# EAGLE board power.rev.3.4 (EAGLE 7.5.0)
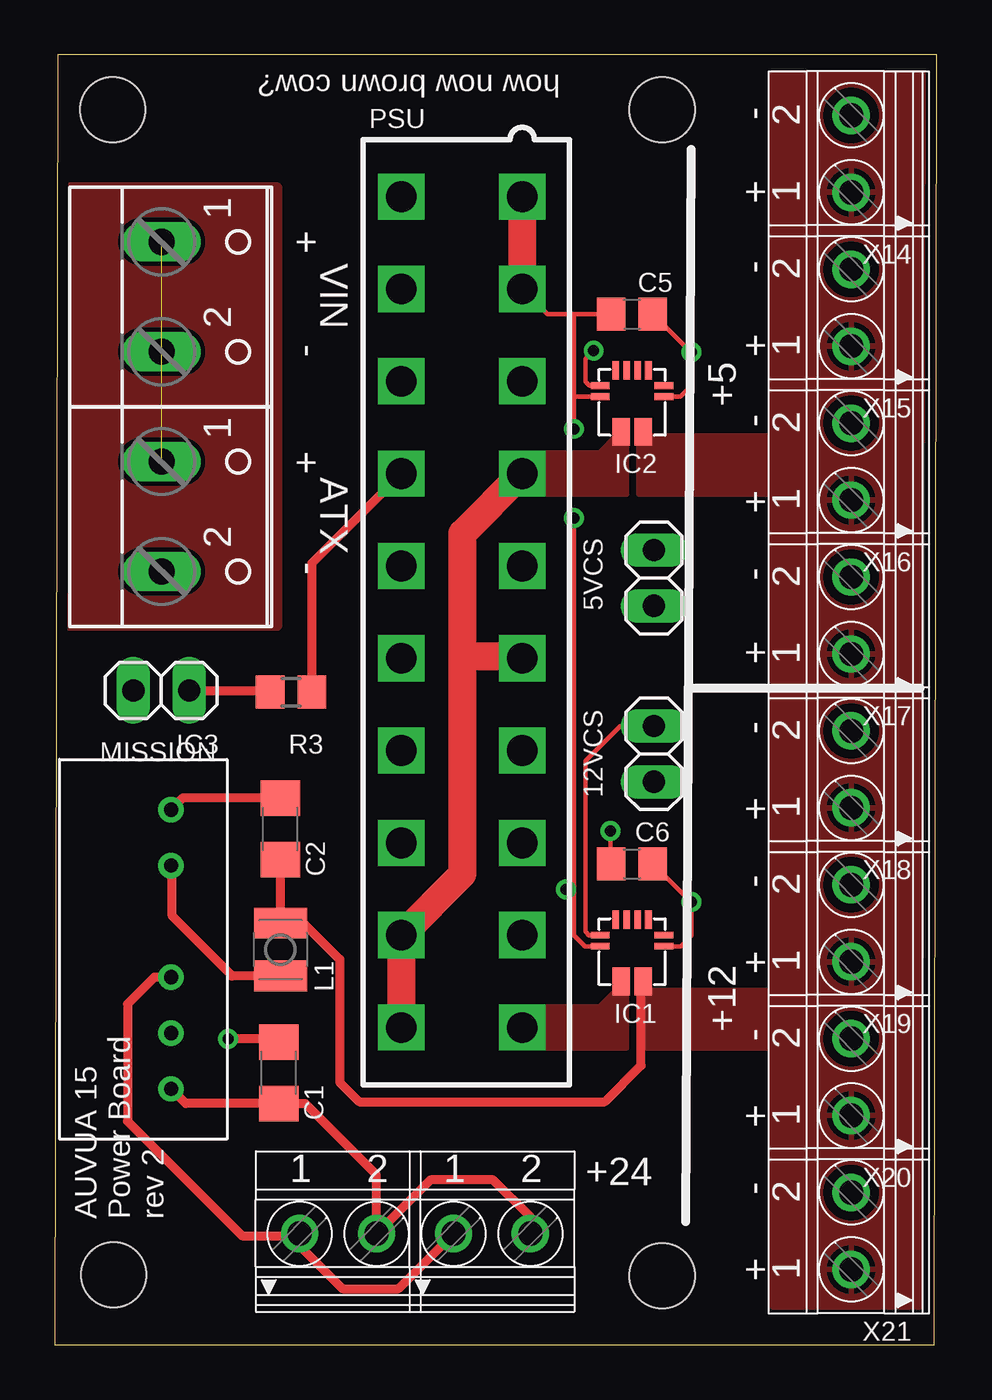
[diagram p0: board, top side]
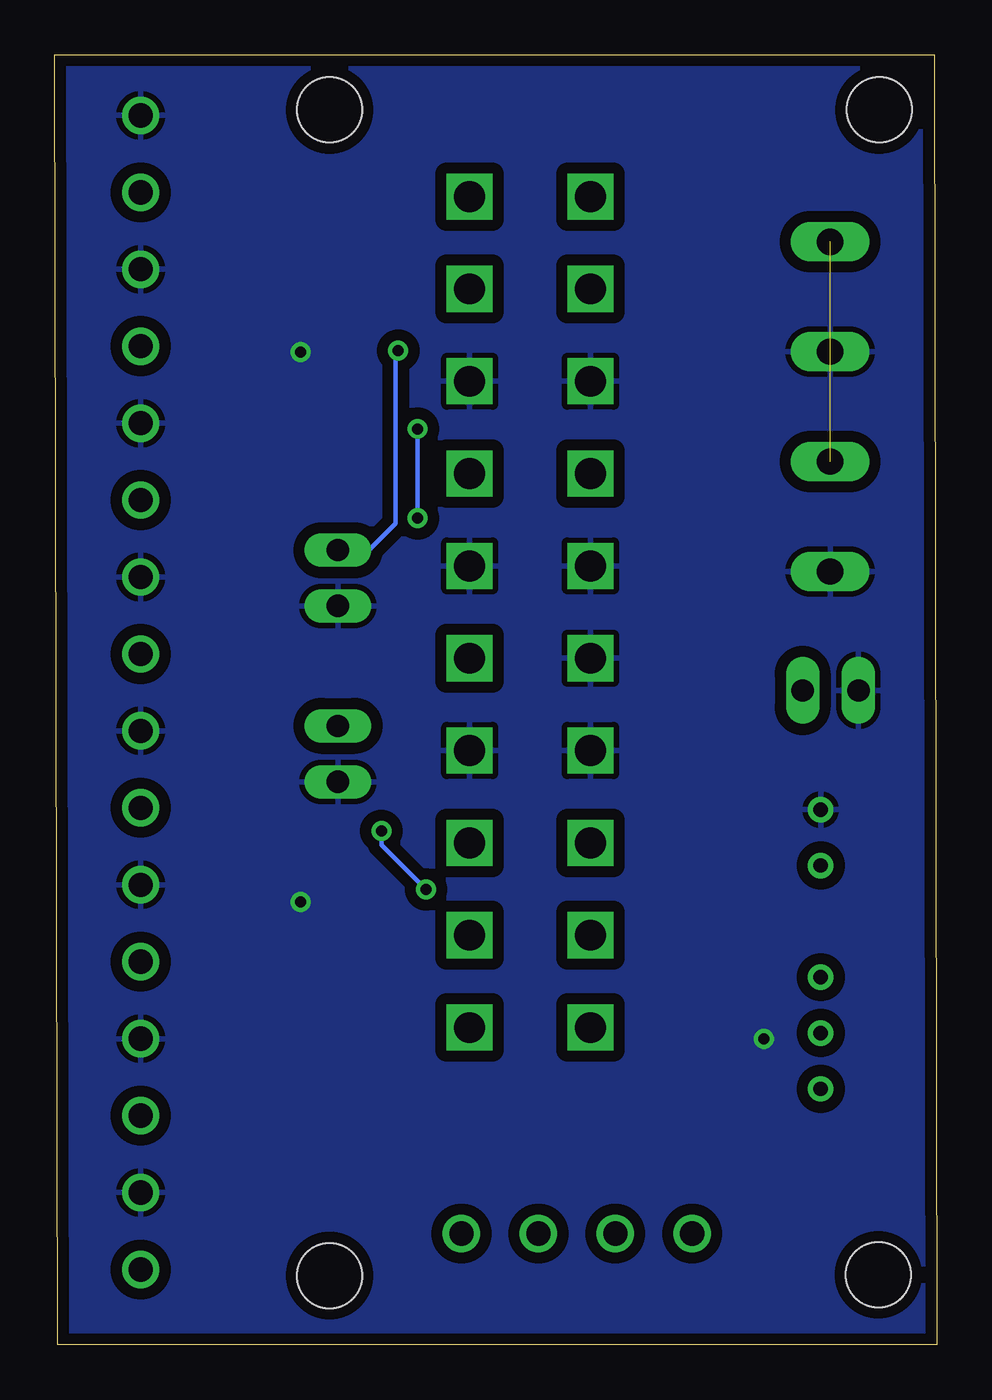
[diagram p1: board, bottom side, seen from below]

Size 40.13 x 58.66 mm. Coordinates in mm from the lower left corner, seen from the top.
Outline: 0,0 40,0 40.13,58.66 0.13,58.66 0,0
Copper layers (1*16): Top 0.035mm / dielectric 1.5mm / Bottom 0.035mm
Design rules "default *": minimum track width 8mil, minimum drill 20mil, track to track 8mil, track to pad 8mil, pad to pad 6mil, via to via 8mil, smd to smd 8mil, copper to edge 20mil, drill to drill 8mil, minimum pad ring 10mil, minimum via ring 8mil, stop-mask expansion 4mil, vias tented up to drill 0mil, thermal gap 10mil
Holes 2.95 mm at 2.67,3.18 2.63,56.16 27.63,56.16 27.63,3.13

## Footprints (pad centres in the part's own frame; a part is rotated, then mirrored left to right if it is on the bottom)
1X02 = drill 1.016 long: 1 -1.27,0; 2 1.27,0
W237-102 = drill 1.194 long: 1 -2.5,-1.27; 2 2.5,-1.27
C1206 = smd 1.6 x 1.8: 1 -1.4,0; 2 1.4,0
C0805 = smd 1.3 x 1.5: 1 -0.95,0; 2 0.95,0
12-WFQFN = smd 1.27 x 0.8: P$1 -1.35,0.5; P$2 -1.35,-0.5 | smd 0.3 x 0.85: P$3 0.25,-1.45; P$4 0.75,-1.45; P$9 0.75,1.45; P$10 0.25,1.45 | smd 0.85 x 0.3: P$5 1.45,-0.75; P$6 1.45,-0.25; P$7 1.45,0.25; P$8 1.45,0.75
6-SIP = drill 0.65: P$1 -6.35,0; P$2 -3.81,0; P$3 1.27,0; P$4 3.81,0; P$5 6.35,0
L2825P = smd 1.4 x 2.4: 1 -1.2,0; 2 1.2,0
5566-20 = drill 1.4 square: 1 18.9,-2.75; 2 14.7,-2.75; 3 10.5,-2.75; 4 6.3,-2.75; 5 2.1,-2.75; 6 -2.1,-2.75; 7 -6.3,-2.75; 8 -10.5,-2.75; 9 -14.7,-2.75; 10 -18.9,-2.75; 11 18.9,2.75; 12 14.7,2.75; 13 10.5,2.75; 14 6.3,2.75; 15 2.1,2.75; 16 -2.1,2.75; 17 -6.3,2.75; 18 -10.5,2.75; 19 -14.7,2.75; 20 -18.9,2.75
R0805 = smd 1.3 x 1.5: 1 -0.95,0; 2 0.95,0
1751248 = drill 1.1 pad 1.7: 1 -1.75,-0.1; 2 1.75,-0.1

## Placement (x,y rotation side)
5VCS  [1X02]  27.25,34.87 90 top
12VCS  [1X02]  27.25,26.87 90 top
ATX  [W237-102]  6.13,37.66 270 top
C1  220pF  [C1206]  10.18,12.36 90 top
C2  4.7uF  [C1206]  10.25,23.45 90 top
C5  0.1u  [C0805]  26.25,46.87 0 top
C6  0.1u  [C0805]  26.25,21.87 0 top
IC1  [12-WFQFN]  26.25,17.87 90 top
IC2  [12-WFQFN]  26.25,42.87 90 top
IC3  ITW1224SA  [6-SIP]  5.29,17.98 270 top
L1  18 uH  [L2825P]  10.26,17.97 270 top
MISSION  [1X02]  4.84,29.76 180 top
PSU  5566-20  [5566-20]  18.51,33.32 90 top
R3  10k  [R0805]  10.74,29.67 0 top
VIN  [W237-102]  6.13,47.66 270 top
X14  1751248  [1751248]  36.13,54.16 90 top
X15  1751248  [1751248]  36.13,47.16 90 top
X16  1751248  [1751248]  36.13,40.16 90 top
X17  1751248  [1751248]  36.13,33.16 90 top
X18  1751248  [1751248]  36.13,26.16 90 top
X19  1751248  [1751248]  36.13,19.16 90 top
X20  1751248  [1751248]  36.13,12.16 90 top
X21  1751248  [1751248]  36.13,5.16 90 top
X22  1751248  [1751248]  19.88,5.15 0 top
X23  1751248  [1751248]  12.88,5.15 0 top

## Library data of the parts
5VCS 12VCS MISSION = pinhead
ATX VIN = con-wago-500; MPN: 237-102; OC_FARNELL: unknown; OC_NEWARK: 70K9898
C1 C2 L1 R3 = resistor
C5 C6 = rcl
IC1-IC3 = zonapowerbrd
PSU = con-molex; OC_FARNELL: unknown; OC_NEWARK: unknown
X14-X23 = con-phoenix-350; OC_FARNELL: unknown; OC_NEWARK: unknown

## Nets
+3V3: C5.1 C6.1 IC1.P$10 IC2.P$10 PSU.1 PSU.2
+5V: IC2.P$1 PSU.4 PSU.6 PSU.19 PSU.20
+12V: IC1.P$1 PSU.10
GND: 5VCS.1 12VCS.1 ATX.2 C1.2 C2.2 C5.2 C6.2 IC1.P$3 IC2.P$3 IC3.P$1 MISSION.2 PSU.3 PSU.5 PSU.7 PSU.13 PSU.15 PSU.16 PSU.17 VIN.2 X14.2 X15.2 X16.2 X17.2 X18.2 X19.2 X20.2 X21.2
N$1: IC3.P$3 X22.1 X23.1
N$2: C1.1 IC3.P$5 X22.2 X23.2
N$3: IC3.P$2 L1.2
N$4: ATX.1 VIN.1
N$5: PSU.14 R3.2
N$6: MISSION.1 R3.1
N$11: C2.1 IC1.P$2 L1.1 X18.1 X19.1 X20.1 X21.1
N$13: IC2.P$2 X14.1 X15.1 X16.1 X17.1
N$14: 12VCS.2 IC1.P$9
N$15: 5VCS.2 IC2.P$9

## Tracks (layer width: path | path; a pad name or v marks a point on that pad's centre or on a via)
+3V3  (via drill 0.5)
  Top 0.203: IC1.P$10 24.11,18.12 23.62,18.61 23.62,20.7 | 21.26,47.55 PSU.2 22.41,46.87 23.62,46.87 | 23.62,20.7 v23.62,37.59 | 23.62,43.05 23.62,46.87 | v23.62,41.66 23.62,43.05 | 23.62,43.05 23.69,43.12 IC2.P$10 | C6.1 25.28,21.84 v25.28,23.36 v25.27,23.37 | v23.24,20.7 23.62,20.7 | C5.1 23.62,46.87
  Top 1.27: PSU.1 PSU.2
  Bottom 0.203: v23.62,37.59 v23.62,41.66 | v25.27,23.37 25.27,22.73 v23.24,20.7
+5V
  Top 1.27: PSU.4 18.54,36.9 18.54,31.31 | PSU.20 PSU.19 18.54,21.4 18.54,31.31 | PSU.6 21.17,31.31 18.54,31.31
  pour Top (no thermals): 26.04,41.34 26.04,38.67 22.1,38.67 22.1,40.58 24.77,40.58 25.53,41.34
+12V
  pour Top (no thermals): 26.04,16.14 26.04,13.47 22.1,13.47 22.1,15.38 24.77,15.38 25.53,16.14
GND  (via drill 0.5)
  Top 0.203: C6.2 28.96,20.12 | 28.96,20.12 28.96,18.61 28.47,18.12 IC1.P$3 | C5.2 28.96,45.12 | 28.96,45.12 28.96,43.62 28.45,43.12 IC2.P$3 | 28.96,45.12 v28.96,45.15 | 28.96,20.12 v28.96,20.13
  Top 0.406: C1.2 10.05,13.76 9.91,13.91 v7.87,13.91 | C2.2 5.81,24.85 IC3.P$1
  pour Bottom (isolate 0.508, rank 2): 0.13,58.66 40.13,58.66 40.25,0.51 0.25,0.51
N$1
  Top 0.406: IC3.P$3 4.52,16.71 3.3,15.49 3.3,10.16 8.51,4.95 11.04,4.95 X23.1 11.13,4.49 13.08,2.54 15.62,2.54 X22.1
N$2
  Top 0.406: IC3.P$5 5.96,10.96 C1.1 11.39,10.96 14.61,7.75 14.61,5.07 X23.2 17.08,7.49 19.94,7.49 21.63,5.8 X22.2
N$3
  Top 0.406: L1.2 8.06,16.77 5.33,19.49 5.33,21.74 IC3.P$2
N$4  (1 unrouted)
N$5
  Top 0.406: R3.2 11.69,35.55 PSU.14
N$6
  Top 0.406: MISSION.1 9.71,29.76 R3.1
N$11
  Top 0.406: C2.1 10.26,22.04 L1.1 11.31,19.17 12.95,17.53 12.95,11.94 13.84,11.05 25.02,11.05 26.67,12.7 26.67,16.44 IC1.P$2
  pour Top (isolate 0.406, rank 3): 40.26,29.66 32.64,29.66 32.64,1.71 40.26,1.71
  pour Top (no thermals): 26.54,16.14 32.89,16.14 32.89,13.47 26.54,13.47
N$13
  pour Top (isolate 0.406, rank 2): 40.26,57.85 32.64,57.85 32.64,30.16 40.26,30.16
  pour Top (no thermals): 26.54,41.34 32.89,41.34 32.89,38.67 26.54,38.67
N$14
  Top 0.203: 12VCS.2 25.73,28.14 24.13,26.54 24.13,18.8 24.3,18.62 IC1.P$9
N$15  (via drill 0.5)
  Top 0.203: IC2.P$9 24.32,43.62 24.13,43.81 24.13,44.83 v24.51,45.21
  Bottom 0.203: v24.51,45.21 24.51,45.09 24.64,44.96 24.64,37.34 25.83,36.14 5VCS.2
N$17
  pour Top: 0.13,52.66 10.13,52.66 10.13,32.66 0.13,32.66

## Text on the board
tNames: how now brown cow? | - | + | + | - | - | + | +5 | - | + | + | - | - | + | - | + | - | + | +12 | - | + | +24 | - | AUVUA 15 / Power Board / rev 2 | +